# Altium PCB ledbrick_plus_led.PcbDoc
Units mil, origin at the board's own origin, x right, y up, seen from the top; angles counter-clockwise.
Board outline 6299.21 x 3425.2 mil, 2 copper layers (Top Layer, Bottom Side), stack 62.424 mil thick; 91 components, 89 nets, 287 pads, 0 vias.
Unrouted connection lines stored in the file: 3.
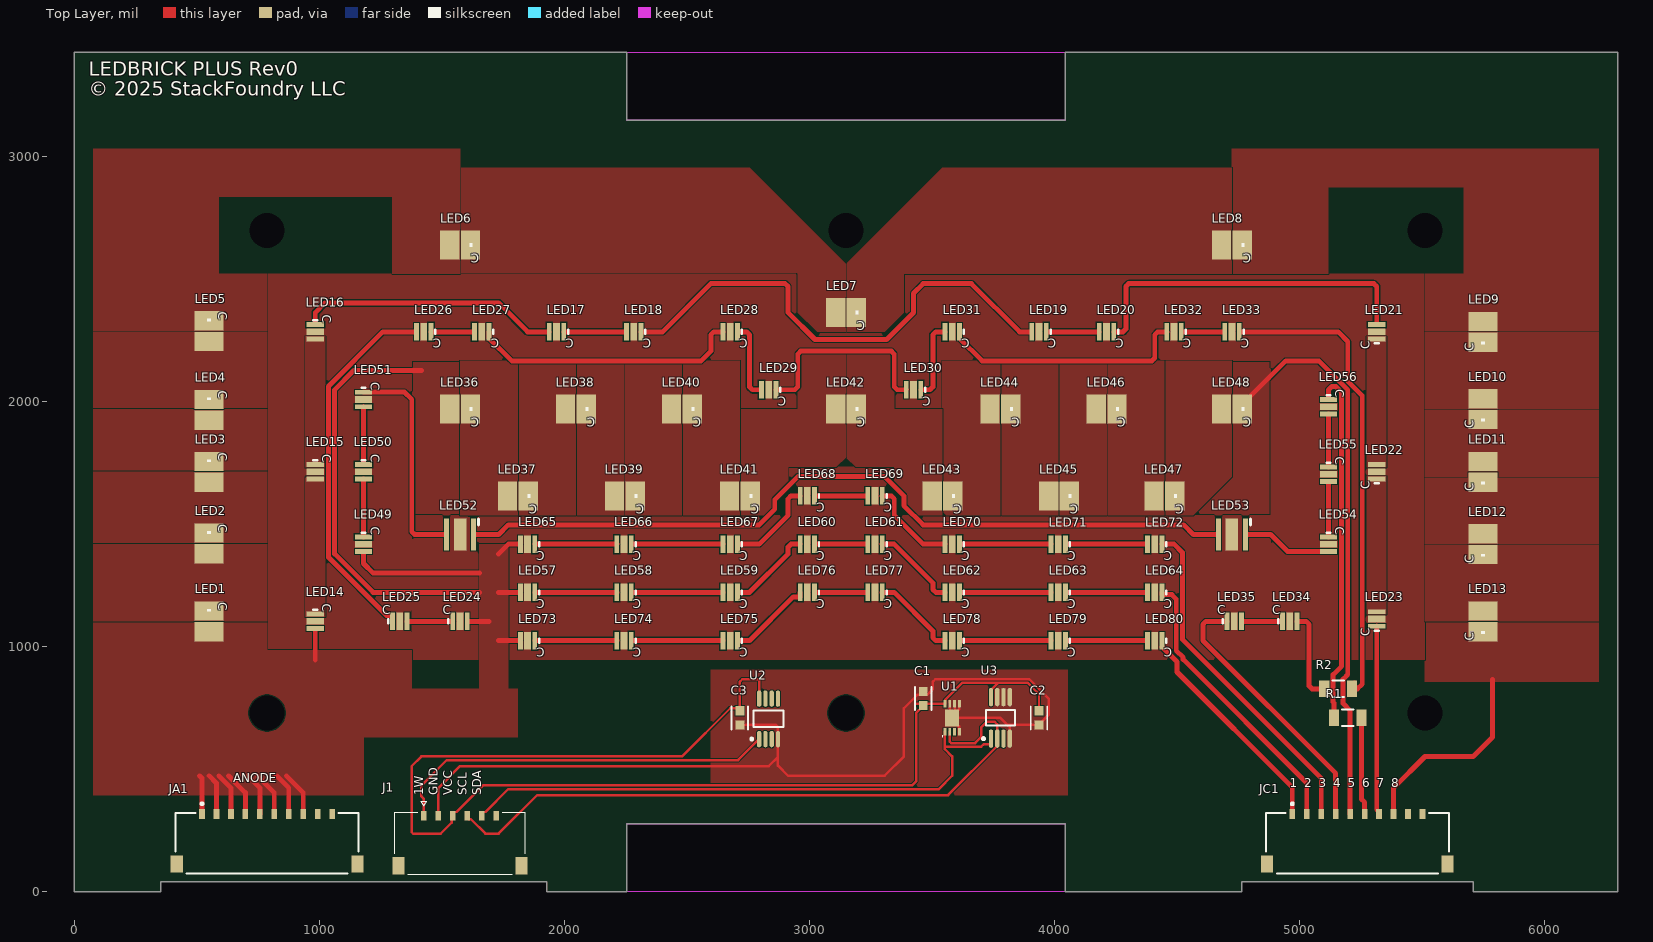
[diagram p0: Top Layer view]
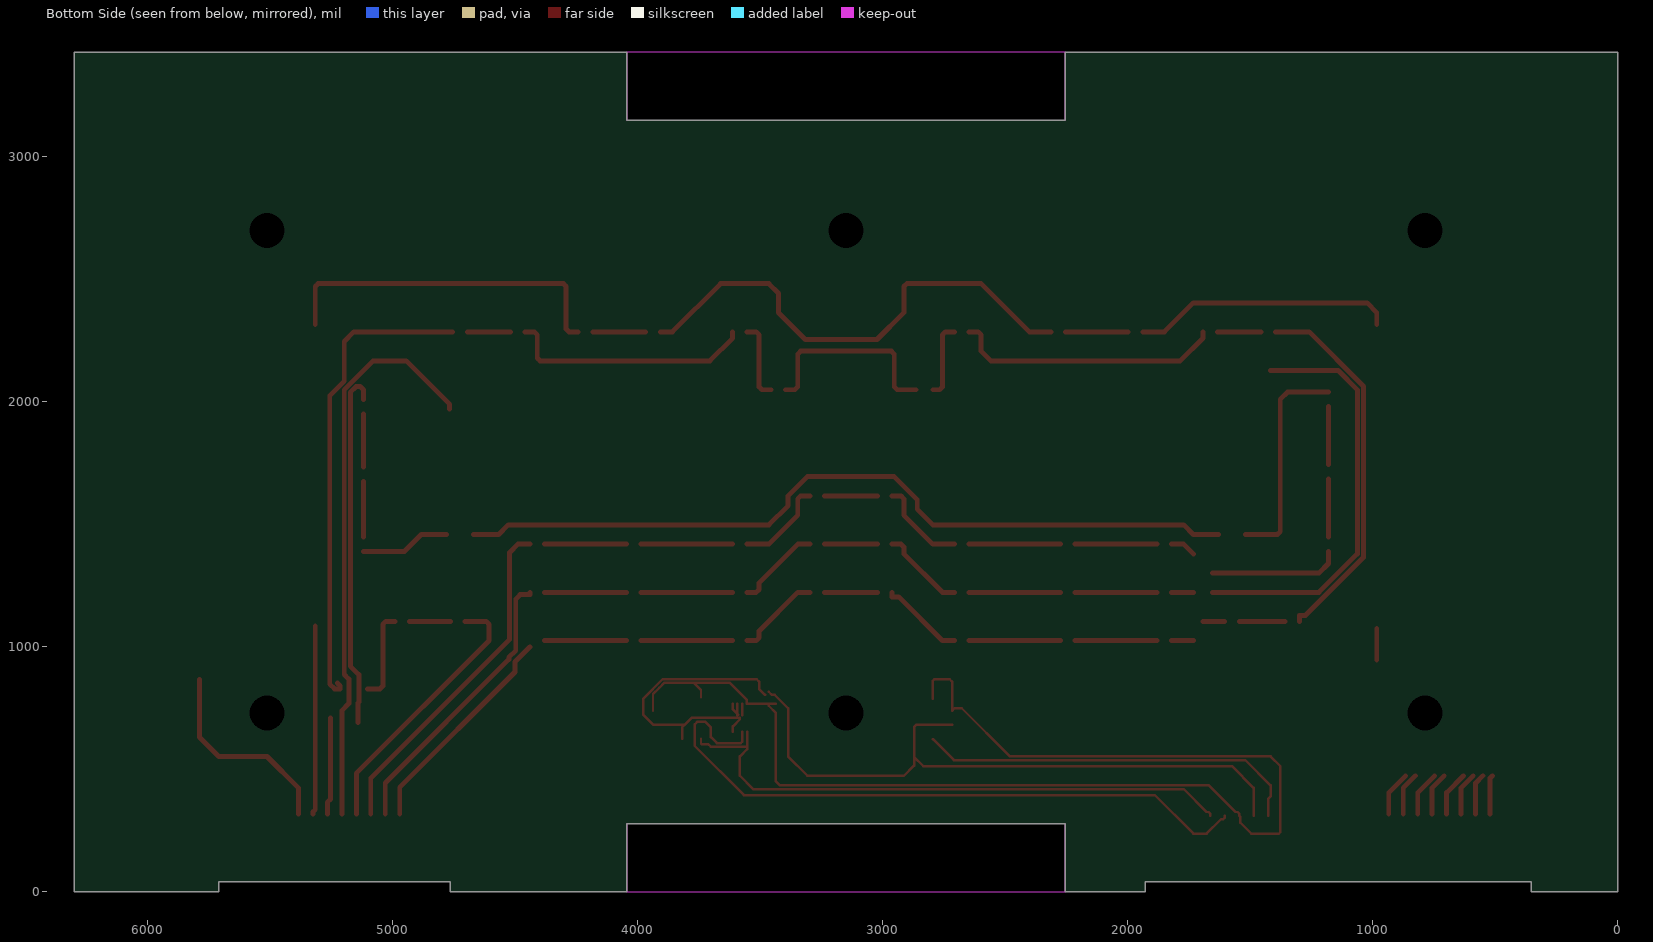
[diagram p1: Bottom Side view, seen from below]
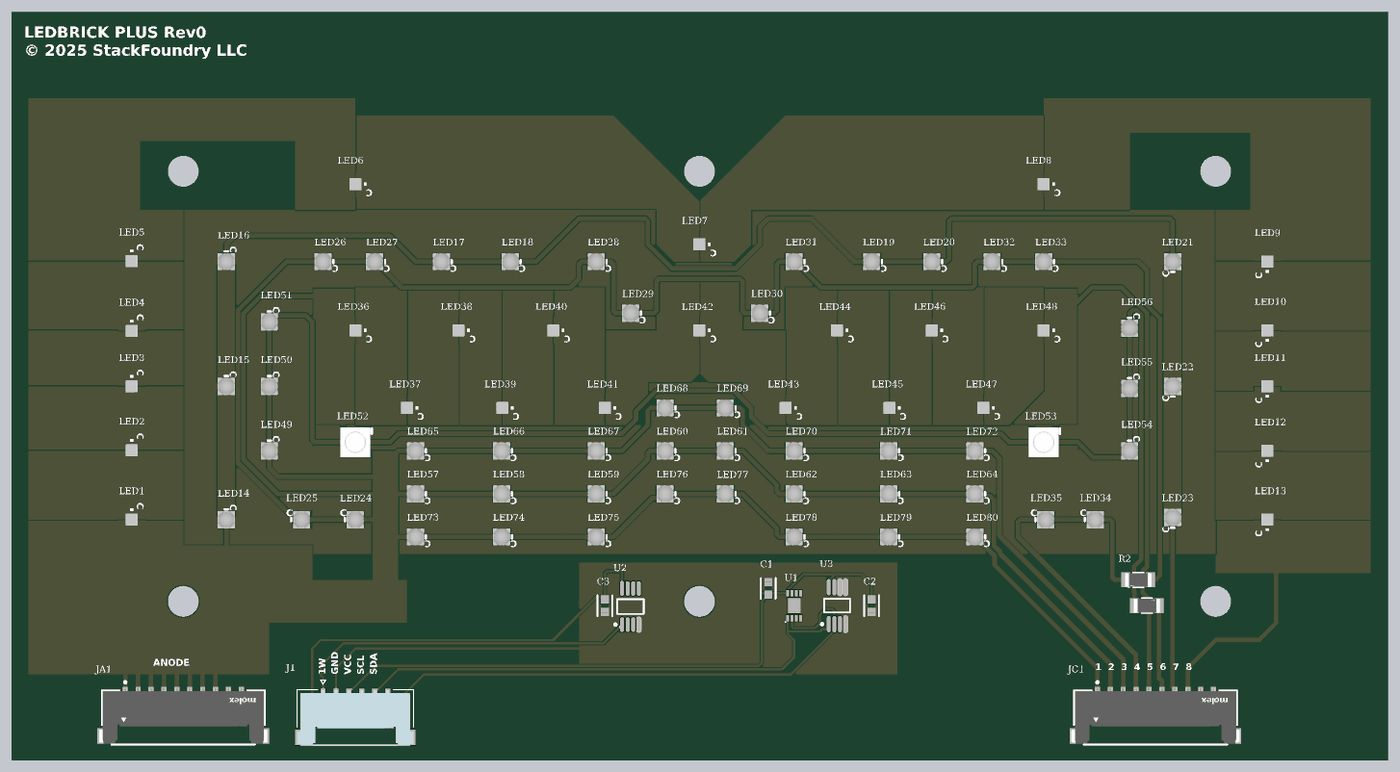
[diagram p2: 3D render of the assembled board from above, using the file's embedded part models]

## Layer stack, top to bottom
Top Solder: solder mask 0.4, Solder Resist, Dk 3.5
Top Layer: signal copper 1.4
Dielectric 1: dielectric 61.0236, FR-4, Dk 4.8
Bottom Side: signal copper (thickness not stored)

## Board outline
354.33,0 354.33,39.37 1929.13,39.37 1929.13,0 2255.91,0 2255.91,277.56 4043.31,277.56 4043.31,0 4763.78,0 4763.78,39.37 5708.66,39.37 5708.66,0 6299.21,0 6299.21,3425.2 4043.31,3425.2 4043.31,3147.64 2255.91,3147.64 2255.91,3425.2 0,3425.2 0,0
cut-out: 4043.31,277.56 4043.31,0 2255.91,0 2255.91,277.56
cut-out: 4043.31,3425.2 4043.31,3147.64 2255.91,3147.64 2255.91,3425.2

## Design rules (kind name [scope] priority, off if disabled: settings)
Clearance [All] p1: gap=5 ignorepadtopadclearanceinfootprint=FALSE
DiffPairsRouting [All] p1: maxlimit=10 minlimit=10 mostfreqgap=10 toplayer_minwidth=15 toplayer_maxwidth=15 toplayer_prefwidth=15 bottomlayer_minwidth=15 bottomlayer_maxwidth=15 bottomlayer_prefwidth=15 substack1={F33BE5C2-3215-45A0-9E63-FB9E8E5C9FC0} toplayer_{f33be5c2-3215-45a0-9e63-fb9e8e5c9fc0}_minwidth=15 toplayer_{f33be5c2-3215-45a0-9e63-fb9e8e5c9fc0}_maxwidth=15 toplayer_{f33be5c2-3215-45a0-9e63-fb9e8e5c9fc0}_prefwidth=15 bottomlayer_{f33be5c2-3215-45a0-9e63-fb9e8e5c9fc0}_minwidth=15 bottomlayer_{f33be5c2-3215-45a0-9e63-fb9e8e5c9fc0}_maxwidth=15 bottomlayer_{f33be5c2-3215-45a0-9e63-fb9e8e5c9fc0}_prefwidth=15 maxuncoupledlength=500
PolygonConnect [All] p1: thpad.connectstyle=Relief thpad.reliefconductorwidth=10 thpad.reliefentries=4 thpad.polygonreliefangle="90 Angle" thpad.airgapwidth=10 smdpad.connectstyle=Direct smdpad.reliefconductorwidth=10 smdpad.reliefentries=4 smdpad.polygonreliefangle="90 Angle" smdpad.airgapwidth=10 via.connectstyle=Direct via.reliefconductorwidth=10 via.reliefentries=4 via.polygonreliefangle="90 Angle" via.airgapwidth=10
RoutingVias [All] p1: holewidth=28 width=50 viastyle="Through Hole" minholewidth=28 minwidth=50 maxholewidth=28 maxwidth=50
SolderMaskExpansion [All] p1: expansion=4 istentingtop=FALSE
SupplyNets "Schematic Supply Nets_1" [InNet('GND')] p1: voltage=0.000
SupplyNets "Schematic Supply Nets" [InNet('VCC')] p2: voltage=0.000
Width [All] p1: maxlimit=10 minlimit=10 preferedwidth=10 substack1={F33BE5C2-3215-45A0-9E63-FB9E8E5C9FC0} toplayer_{f33be5c2-3215-45a0-9e63-fb9e8e5c9fc0}_maxwidth=50 bottomlayer_{f33be5c2-3215-45a0-9e63-fb9e8e5c9fc0}_maxwidth=50
29 further rules are at their usual default settings.

## Components (designator, comment, footprint, x,y, rotation, side; value= is the part's Value field where it differs from the comment)
C1 "CAP 0.1uF 50V X7R 0603" FP-CL10-IPC_B 3464.57,787.4 r90 top value=0.1uF
C2 "CAP 0.1uF 50V X7R 0603" FP-CL10-IPC_B 3937.01,708.66 r270 top value=0.1uF
C3 "CAP 0.1uF 50V X7R 0603" FP-CL10-IPC_B 2716.54,708.66 r270 top value=0.1uF
J1 "5040500691" MOLEX_5040500691 1574.8,196.85 r180 top
JA1 "504050-1091" FP-504050-1091-MFG 787.4,196.85 r180 top
JC1 "504050-1091" FP-504050-1091-MFG 5236.22,196.85 r180 top
LED1 "L1RX-RYL1000000000" L1RX-RYL1000000000-Footprint-1 551.18,1102.36 r270 top
LED2 "L1RX-RYL1000000000" L1RX-RYL1000000000-Footprint-1 551.18,1420.28 r270 top
LED3 "L1RX-RYL1000000000" L1RX-RYL1000000000-Footprint-1 551.18,1712.6 r270 top
LED4 "L1RX-RYL1000000000" L1RX-RYL1000000000-Footprint-1 551.18,1965.55 r270 top
LED5 "L1RX-RYL1000000000" L1RX-RYL1000000000-Footprint-1 551.18,2286.42 r270 top
LED6 "L1RX-RYL1000000000" L1RX-RYL1000000000-Footprint-1 1574.8,2637.8 r180 top
LED7 "L1RX-RYL1000000000" L1RX-RYL1000000000-Footprint-1 3149.61,2362.2 r180 top
LED8 "L1RX-RYL1000000000" L1RX-RYL1000000000-Footprint-1 4724.41,2637.8 r180 top
LED9 "L1RX-RYL1000000000" L1RX-RYL1000000000-Footprint-1 5748.03,2283.46 r90 top
LED10 "L1RX-RYL1000000000" L1RX-RYL1000000000-Footprint-1 5748.03,1968.5 r90 top
LED11 "L1RX-RYL1000000000" L1RX-RYL1000000000-Footprint-1 5748.03,1712.6 r90 top
LED12 "L1RX-RYL1000000000" L1RX-RYL1000000000-Footprint-1 5748.03,1417.32 r90 top
LED13 "L1RX-RYL1000000000" L1RX-RYL1000000000-Footprint-1 5748.03,1102.36 r90 top
LED14 "L1C1-59" LUXEON_C_DATASHEET 984.25,1102.36 r270 top
LED15 "L1C1-59" LUXEON_C_DATASHEET 984.25,1712.6 r270 top
LED16 "L1C1-59" LUXEON_C_DATASHEET 984.25,2283.46 r270 top
LED17 "L1C1-RYL" LUXEON_C_DATASHEET 1968.5,2283.46 r180 top
LED18 "L1C1-RYL" LUXEON_C_DATASHEET 2283.46,2283.46 r180 top
LED19 "L1C1-RYL" LUXEON_C_DATASHEET 3937.01,2283.46 r180 top
LED20 "L1C1-RYL" LUXEON_C_DATASHEET 4212.6,2283.46 r180 top
LED21 "L1C1-59" LUXEON_C_DATASHEET 5314.96,2283.46 r90 top
LED22 "L1C1-59" LUXEON_C_DATASHEET 5314.96,1712.6 r90 top
LED23 "L1C1-59" LUXEON_C_DATASHEET 5314.96,1112.2 r90 top
LED24 "L1C1-PCB" LUXEON_C_DATASHEET 1574.8,1102.36 r0 top
LED25 "L1C1-PCB" LUXEON_C_DATASHEET 1328.74,1102.36 r0 top
LED26 "L1C1-PCB" LUXEON_C_DATASHEET 1427.17,2283.46 r180 top
LED27 "L1C1-PCB" LUXEON_C_DATASHEET 1663.39,2283.46 r180 top
LED28 "L1C1-BLU" LUXEON_C_DATASHEET 2677.17,2283.46 r180 top
LED29 "L1C1-BLU" LUXEON_C_DATASHEET 2834.65,2047.24 r180 top
LED30 "L1C1-PCB" LUXEON_C_DATASHEET 3425.2,2047.24 r180 top
LED31 "L1C1-PCB" LUXEON_C_DATASHEET 3582.68,2283.46 r180 top
LED32 "L1C1-PCB" LUXEON_C_DATASHEET 4488.19,2283.46 r180 top
LED33 "L1C1-PCB" LUXEON_C_DATASHEET 4724.41,2283.46 r180 top
LED34 "L1C1-BLU" LUXEON_C_DATASHEET 4960.63,1102.36 r0 top
LED35 "L1C1-BLU" LUXEON_C_DATASHEET 4734.25,1102.36 r0 top
LED36 "L1RX-RYL1000000000" L1RX-RYL1000000000-Footprint-1 1574.8,1968.5 r180 top
LED37 "L1RX-RYL1000000000" L1RX-RYL1000000000-Footprint-1 1811.02,1614.17 r180 top
LED38 "L1RX-RYL1000000000" L1RX-RYL1000000000-Footprint-1 2047.24,1968.5 r180 top
LED39 "L1RX-RYL1000000000" L1RX-RYL1000000000-Footprint-1 2247.05,1614.17 r180 top
LED40 "L1RX-RYL1000000000" L1RX-RYL1000000000-Footprint-1 2480.32,1968.5 r180 top
LED41 "L1RX-RYL1000000000" L1RX-RYL1000000000-Footprint-1 2716.54,1614.17 r180 top
LED42 "L1RX-RYL1000000000" L1RX-RYL1000000000-Footprint-1 3149.61,1968.5 r180 top
LED43 "L1RX-RYL1000000000" L1RX-RYL1000000000-Footprint-1 3543.31,1614.17 r180 top
LED44 "L1RX-RYL1000000000" L1RX-RYL1000000000-Footprint-1 3779.53,1968.5 r180 top
LED45 "L1RX-RYL1000000000" L1RX-RYL1000000000-Footprint-1 4018.7,1614.17 r180 top
LED46 "L1RX-RYL1000000000" L1RX-RYL1000000000-Footprint-1 4212.6,1968.5 r180 top
LED47 "L1RX-RYL1000000000" L1RX-RYL1000000000-Footprint-1 4448.82,1614.17 r180 top
LED48 "L1RX-RYL1000000000" L1RX-RYL1000000000-Footprint-1 4724.41,1968.5 r180 top
LED49 "L1C1-VLT" LUXEON_C_DATASHEET 1181.1,1417.32 r270 top
LED50 "L1C1-VLT" LUXEON_C_DATASHEET 1181.1,1712.6 r270 top
LED51 "L1C1-VLT" LUXEON_C_DATASHEET 1181.1,2007.87 r270 top
LED52 "CUN8" VIOSYS_Z5 1574.8,1456.69 r0 top
LED53 "CUN8" VIOSYS_Z5 4724.41,1456.69 r0 top
LED54 "L1C1-VLT" LUXEON_C_DATASHEET 5118.11,1417.32 r270 top
LED55 "L1C1-VLT" LUXEON_C_DATASHEET 5118.11,1702.76 r270 top
LED56 "L1C1-VLT" LUXEON_C_DATASHEET 5118.11,1978.35 r270 top
LED57 "L1C1-59" LUXEON_C_DATASHEET 1850.39,1220.47 r180 top
LED58 "L1C1-59" LUXEON_C_DATASHEET 2244.09,1220.47 r180 top
LED59 "L1C1-59" LUXEON_C_DATASHEET 2677.17,1220.47 r180 top
LED60 "L1C1-59" LUXEON_C_DATASHEET 2992.13,1417.32 r180 top
LED61 "L1C1-59" LUXEON_C_DATASHEET 3267.72,1417.32 r180 top
LED62 "L1C1-59" LUXEON_C_DATASHEET 3582.68,1220.47 r180 top
LED63 "L1C1-59" LUXEON_C_DATASHEET 4015.75,1220.47 r180 top
LED64 "L1C1-59" LUXEON_C_DATASHEET 4409.45,1220.47 r180 top
LED65 "L1C1-39" LUXEON_C_DATASHEET 1850.39,1417.32 r180 top
LED66 "L1C1-39" LUXEON_C_DATASHEET 2244.09,1417.32 r180 top
LED67 "L1C1-DRD" LUXEON_C_DATASHEET 2677.17,1417.32 r180 top
LED68 "L1C1-PCA" LUXEON_C_DATASHEET 2992.13,1614.17 r180 top
LED69 "L1C1-PCA" LUXEON_C_DATASHEET 3267.72,1614.17 r180 top
LED70 "L1C1-DRD" LUXEON_C_DATASHEET 3582.68,1417.32 r180 top
LED71 "L1C1-39" LUXEON_C_DATASHEET 4015.75,1417.32 r180 top
LED72 "L1C1-39" LUXEON_C_DATASHEET 4409.45,1417.32 r180 top
LED73 "L1C1-MNT" LUXEON_C_DATASHEET 1850.39,1023.62 r180 top
LED74 "L1C1-CYN" LUXEON_C_DATASHEET 2244.09,1023.62 r180 top
LED75 "L1C1-MNT" LUXEON_C_DATASHEET 2677.17,1023.62 r180 top
LED76 "L1C1-CYN" LUXEON_C_DATASHEET 2992.13,1220.47 r180 top
LED77 "L1C1-MNT" LUXEON_C_DATASHEET 3267.72,1220.47 r180 top
LED78 "L1C1-CYN" LUXEON_C_DATASHEET 3582.68,1023.62 r180 top
LED79 "L1C1-MNT" LUXEON_C_DATASHEET 4015.75,1023.62 r180 top
LED80 "L1C1-CYN" LUXEON_C_DATASHEET 4409.45,1023.62 r180 top
R1 "0R 1206" FP-RC1206-IPC_B 5196.85,708.66 r0 top
R2 "0R 1206" FP-RC1206-IPC_B 5157.48,826.77 r180 top
U1 "MCP9808T-E/MC" MCHP-DFN-MC8_V 3582.68,708.66 r90 top
U2 "DS18B20U+T&R" MAXM-U8+1_N 2833.66,704.72 r90 top
U3 "MCP9808" MCHP-MSOP-MS8_M 3779.53,708.66 r90 top

## Footprints (in the part's own frame and the unit in brackets; to place one, negate y for a bottom-side part, rotate by r counter-clockwise, add the part's x,y. Pads: shape width x height; smd on the part's side, far side on the other; paste and mask are expansions set on the pad)
FP-504050-1091-MFG [mm]
  rect 0.6x1 smd paste+0 mask+0: 1(6.75,-3.04) 2(5.25,-3.04) 3(3.75,-3.04) 4(2.25,-3.04) 5(0.75,-3.04) 6(-0.75,-3.04) 7(-2.25,-3.04) 8(-3.75,-3.04) 9(-5.25,-3.04) 10(-6.75,-3.04)
  rect 1.25x1.8 smd paste+0 mask+0: 11(-9.355,2.15) 12(9.355,2.15)
  silkscreen extent -9.48,-4.21 9.48,3.15, body extent -10.08,-3.64 10.08,3.25, height 0.25
FP-CL10-IPC_B [mil]
  rect 37.72x35.91 smd paste+0 mask+0: 1(-28.62,0) 2(28.62,0)
  silkscreen extent -47,-34 47,34, body extent -57,-28 57,28, height 10
FP-RC1206-IPC_B [mil]
  rect 41.66x67.41 smd paste+0 mask+0: 1(-56.18,0) 2(56.18,0)
  silkscreen extent -24,-34 24,34, body extent -87,-44 87,44, height 10
L1RX-RYL1000000000-Footprint-1 [mm]
  rect 2x3 smd paste-2539.97 mask-2: A(1.075,0) C(-1.075,0)
  silkscreen extent -1.3,-0.2 -1,0.2, body extent -0.7,-0.7 0.7,0.7, height 0.8
LUXEON_C_DATASHEET [mm]
  rect 0.5x1.8 smd paste-2539.97 mask-3: A(0.75,0)
  rect 0.5x1.8 smd paste-2539.97 mask-2: C(-0.75,0)
  rect 0.69x1.8 smd paste-2539.97 mask-3: PAD(0,0)
  silkscreen extent -1.2,-0.2 -1.2,0.2, body extent -1,-1 1,1, height 1.36
MAXM-U8+1_N [mm] "SOP, 8-Leads, Body 3x3mm, Pitch 0.65mm, IPC Medium Density"
  oval 1.7x0.45 smd: 1(-2.1,0.975) 2(-2.1,0.325) 3(-2.1,-0.325) 4(-2.1,-0.975) 5(2.1,-0.975) 6(2.1,-0.325) 7(2.1,0.325) 8(2.1,0.975)
  silkscreen extent -2.22,-1.55 0.85,1.87, body extent -1.55,-1.55 1.55,1.55, height 1.1
MCHP-DFN-MC8_V [mm] "SON, 8-Leads, Body 3x2mm, Pitch 0.5mm, Thermal Pad 1.45x1.75mm"
  rect 0.75x0.3 smd mask+0.102: 1(-1.45,0.75) 2(-1.45,0.25) 3(-1.45,-0.25) 4(-1.45,-0.75) 5(1.45,-0.75) 6(1.45,-0.25) 7(1.45,0.25) 8(1.45,0.75)
  rect 1.75x1.45 smd mask+0.102: 9(0,0)
  silkscreen extent -1.95,0.95 -1.85,1.05, body extent -1.5,-1 1.5,1, height 1
MCHP-MSOP-MS8_M [mm] "SOP, 8-Leads, Body 3x3mm, Pitch 0.65mm, IPC Low Density"
  oval 1.9x0.45 smd: 1(-2.15,0.975) 2(-2.15,0.325) 3(-2.15,-0.325) 4(-2.15,-0.975) 5(2.15,-0.975) 6(2.15,-0.325) 7(2.15,0.325) 8(2.15,0.975)
  silkscreen extent -2.27,-1.5 0.8,1.87, body extent -1.5,-1.5 1.5,1.5, height 1.1
MOLEX_5040500691 [mm]
  rect 0.6x1 smd mask+0.076: 1(3.75,-2.87) 2(2.25,-2.87) 3(0.75,-2.87) 4(-0.75,-2.87) 5(-2.25,-2.87) 6(-3.75,-2.87)
  rect 1.25x1.8 smd mask+0.076: S1(6.355,2.32) S2(-6.355,2.32)
  silkscreen extent -6.78,-4.37 6.78,3.22, body extent -6.78,-3.18 6.78,3.26, height 2
VIOSYS_Z5 [mm]
  rect 0.5x3.3 smd: A(-1.4,0) C(1.4,0)
  rect 1.3x3.3 smd: PAD(0,0)
  Top Layer region: 1.6,-0.25 2.15,-0.25 2.15,0.25 1.6,0.25
  Top Layer region: -2.15,-0.25 -1.6,-0.25 -1.6,0.25 -2.15,0.25
  silkscreen extent 1.9,1 1.9,1.6, body extent -1.73,-1.72 1.72,1.73, height 2.01

## Part data
C1 C2 C3: library part CMP-001-00084-7, "Cap Ceramic 0.1uF 50V X7R 20% SMD 0603 125C Paper T/R", Voltage=50V
J1: library part CMP-253-000000-2, "CONN WIRE TO BOARD RA 6POS", Color=Black, Current Rating=3A, Flammability Rating="UL94 V-0", Max Operating Temperature=85°C, Min Operating Temperature=-25°C, Package=None, Package Quantity=2700, Voltage Rating=150V, Availability=Unavailable, Component Type=Standard, Connector Type="Blade Pin", Contact Gender=Male, Contact Material="Copper Alloy,Copper", Contact Plating=Gold, Depth=6.44mm, Design Item ID=5040500691, Gender=Male, Glow Wire Compliant=Non-compliant, Halogen Free="Low Halogen", Housing Color=Black, Housing Material=Thermoplastic, Length=13.55mm, Mounting Technology="Surface Mount", MP=5040500691, Number of Circuits=6, Number of Contacts=6, Number of Positions=6, Number of Rows=1, Orientation="Right Angle", Packaging="Tape and Reel", Pin Count=8, Pitch=1.5mm, Price=None, Radiation Hardening=No, RoHS Compliant=Yes, Source=5040500691.SchLib, Termination=SMD/SMT
JA1 JC1: library part CMP-002-00088-1, "Conn Wire to Board HDR 10 POS 1.5mm Solder RA SMD Pico-Lock™ T/R"
LED1 LED2 LED3 LED4 LED5 LED6 LED7 LED8 LED9 LED10 LED11 LED12 LED13 LED36 LED37 LED38 LED39 LED40 LED41 LED42 LED43 LED44 LED45 LED46 LED47 LED48: library part CMP-007-00052-3, "LUXEON Rubix High Power LED Royal Blue Square Surface Mount 1635 lm 1.5 A 3.16 V", Forward Current=3A, Forward Voltage=3.5V, Height=780µm, Lifecycle Status=Production, Mounting Technology="Surface Mount", Number of Circuits=1, Number of Terminals=2, Peak Wavelength=447.5nm, REACH SVHC=Yes, RoHS=Compliant, Shape=Square, Terminal Pitch=725µm, Viewing Angle=125°
LED14 LED15 LED16 LED17 LED18 LED19 LED20 LED21 LED22 LED23 LED24 LED25 LED26 LED27 LED28 LED29 LED30 LED31 LED32 LED33 LED34 LED35 LED49 LED50 LED51 LED52 LED53 LED54 LED55 LED56 LED57 LED58 LED59 LED60 LED61 LED62 LED63 LED64 LED65 LED66 LED67 LED68 LED69 LED70 LED71 LED72 LED73 LED74 LED75 LED76 LED77 LED78 LED79 LED80: library part CMP-124-0001-3, Design Item ID=LED_THERMAL, Source=high-power-led.SCHLIB
R1 R2: library part CMP-009-00181-1, "Res Jumper Thick Film 1206 0 Ohm 5% 1/4W Molded SMD Paper T/R", Case Code (Imperial)=1206, Case Code (Metric)=3216, Max Operating Temperature=155°C, Max Power Dissipation=250mW, Min Operating Temperature=-55°C, Package Quantity=5000, Resistance=0mR, Resistor Type="Thick Film,Carbon Film", Temperature Coefficient=200ppm/°C, Tolerance=5%, Voltage Rating=200V, Case/Package=1206, Contact Plating=Tin,Matte, Depth=1.6mm, Height=0.026inch, Lead Free="Lead Free", Length=3.1mm, Military Standard=Not, Number of Terminations=2, Packaging="Tape and Reel", Power Rating=250mW, Radiation Hardening=No, REACH SVHC=Unknown, Termination=SMD/SMT, Width=0.063inch
U1: library part CMP-010-00024-2, "Temp Sensor Digital Serial (2-Wire, I2C) 8-Pin DFN EP T/R", Case/Package=DFN, Max Operating Temperature=125°C, Max Supply Voltage=5.5V, Min Operating Temperature=-40°C, Min Supply Voltage=2.7V, Nominal Supply Current=200uA, Package Quantity=3300, Contact Plating=Tin,Matte, Interface=I2C,SMBus,2-Wire,Serial, Lead Free="Lead Free", Max Supply Voltage (DC)=5.5V, Min Supply Voltage (DC)=2.7V, Number of Bits=16, Number of Pins=8, Operating Supply Current=200uA, Output Current=200uA, Output Type=I2C,Digital, Packaging="Tape and Reel", Radiation Hardening=No, REACH SVHC="No SVHC", Resolution=10b
U2: library part CMP-010-00025-1, "Temp Sensor Digital Serial (1-Wire) 8-Pin uMAX T/R", Case/Package=UMAX, Contact Plating=Tin,Matte, Interface=1-WIRE,Serial, Lead Free="Lead Free"
U3: library part CMP-114-0012-2, "Temp Sensor Digital Serial (2-Wire, I2C) 8-Pin MSOP Tube", Case/Package=MSOP, Max Operating Temperature=125°C, Max Supply Voltage=5.5V, Min Operating Temperature=-40°C, Min Supply Voltage=2.7V, Nominal Supply Current=200uA, Package Quantity=100, Height=0.95mm, Interface=I2C,SMBus,2-Wire,Serial, Lead Free="Lead Free", Length=3mm, Max Supply Voltage (DC)=5.5V, Min Supply Voltage (DC)=2.7V, Number of Bits=16, Number of Pins=8, Output Current=200uA, Output Type=I2C,Digital, Packaging=Rail/Tube, Radiation Hardening=No, REACH SVHC="No SVHC", Resolution=10b, Width=3mm

## Free pads (board coordinates)
  round 60 hole 141.73 unplated: Hole1(3149.61,2696.85) Hole1_2(3149.61,728.35) Hole4(787.4,2696.85) Hole4_2(787.4,728.35) Hole4_3(5511.81,728.35) Hole4_4(5511.81,2696.85)

## Nets (pads, with @x,y where several pads share a name; then routed paths per layer and width w, separated by ;. In a path a pad name is that pad's centre, name@x,y a point inside that pad or via, vN(x,y) a via of type N, cw(c..) or ccw(c..) an arc to the next point about the centre after c; other vN are vias at no path point)
1W: J1.1 U2.1 | length 1583.5
  Top Layer w10: J1.1 1427.17,378.02 1417.32,387.86 1417.32,433.07 1520.43,536.18 2709.41,536.18 U2.1
GND: C1.2 C2.2 C3.2 J1.2 U1.4 U1.5 U1.6 U1.7 U1.9 U2.4 U3.4 U3.5 U3.6 U3.7 | length 4076.2
  Top Layer w10: J1.2 1486.22,423.23 1574.8,511.81 2834.65,511.81 2872.05,549.21 ; C3.2 2863.27,680.04 2872.05,671.26 U2.4 2872.05,549.21 ; C1.2 3464.57,815.34 3451.61,802.38 3440.18,802.38 3385.83,748.03 3385.83,551.18 3307.09,472.44 2913.39,472.44 2872.05,513.78 2872.05,549.21 ; C1.2@3479.55,802.38 3503.94,826.77 3503.94,856.3 3513.78,866.14 3897.64,866.14 3976.38,787.4 3976.38,720.32 3937.01,680.95 C2.2 3808.15,680.04 ; U1.9@3572.83,718.5 U1.7 ; U1.9@3589.57,721.46 U1.9@3592.52,724.41 ; U1.9@3592.52,718.5 U1.9@3592.52,724.41 ; U1.6 U1.9@3592.52,724.41 ; U1.4 3611.3,652.48 3611.3,674.13 3582.68,702.76 U1.9 3779.53,708.66 3808.15,680.04 ; U1.5 3611.3,764.84 3611.3,743.19 U1.9@3592.52,724.41 ; U3.4 3817.91,670.28 3808.15,680.04
NetJA1_1: JA1.1 JA1.2 JA1.3 JA1.4 JA1.5 JA1.6 JA1.7 JA1.8 LED1.A LED14.A LED24.A LED36.A LED49.A LED57.A LED65.A LED73.A | length 4158.9
  Top Layer w20: 511.81,472.44 521.65,462.6 JA1.1 ; 551.18,472.44 580.71,442.91 JA1.2 ; 590.55,472.44 639.76,423.23 JA1.3 ; 629.92,472.44 698.82,403.54 JA1.4 ; 708.66,472.44 757.87,423.23 JA1.5 ; 748.03,472.44 816.93,403.54 JA1.6 ; 826.77,472.44 875.98,423.23 JA1.7 ; 866.14,472.44 935.04,403.54 JA1.8 ; 984.25,944.88 LED14.A ; LED49.A 1181.1,1338.58 1220.47,1299.21 1653.54,1299.21 ; 1417.32,2125.98 1141.73,2125.98 1062.99,2047.24 1062.99,1377.95 1220.47,1220.47 1653.54,1220.47 ; LED24.A 1692.91,1102.36 ; 1732.28,1023.62 LED73.A ; 1732.28,1220.47 LED57.A ; 1732.28,1377.95 1771.65,1417.32 LED65.A
NetJC1_1: JC1.1 LED80.C | length 901.7
  Top Layer w20: LED80.C@4439.13,998.19 4500.21,937.11 4500.21,895.73 4970.47,425.47 JC1.1
NetJC1_2: JC1.2 LED64.C | length 1172
  Top Layer w20: LED64.C 4438.98,1211.59 4439.13,1211.43 4479.15,1211.43 4497.24,1193.34 4497.24,983.23 4525.21,955.26 4525.21,947.23 5029.53,442.91 JC1.2
NetJC1_3: JC1.3 LED72.C | length 1398.7
  Top Layer w20: LED72.C 4488.19,1417.32 4522.24,1383.27 4522.24,1028.94 5088.58,462.6 JC1.3
NetJC1_4: JC1.4 LED35.C | length 1101.6
  Top Layer w20: LED35.C 4618.01,1102.36 4606.3,1090.65 4606.3,1023.62 5147.64,482.28 JC1.4
NetJC1_5: JC1.5 LED48.C | length 2322.7
  Top Layer w20: LED48.C 4766.73,1988.19 4943.9,2165.35 5078.74,2165.35 5196.85,2047.24 5196.85,885.71 5177.83,866.69 5177.83,767.05 5206.69,738.19 JC1.5
NetJC1_6: JC1.6 R1.2 | length 397.4
  Top Layer w20: R1.2 5253.03,376.89 5265.75,364.17 JC1.6
NetJC1_7: JC1.7 LED23.C | length 770.2
  Top Layer w20: LED23.C 5314.96,334.25 5324.8,324.41 JC1.7
NetJC1_8: JC1.8 LED13.C | length 832.1
  Top Layer w20: JC1.8 5383.86,423.23 5511.81,551.18 5708.66,551.18 5787.4,629.92 5787.4,866.14
NetLED1_C: LED1.C LED2.A
NetLED2_C: LED2.C LED3.A
NetLED3_C: LED3.C LED4.A
NetLED4_C: LED4.C LED5.A
NetLED5_C: LED5.C LED6.A
NetLED6_C: LED6.C LED7.A
NetLED7_C: LED7.C LED8.A
NetLED8_C: LED8.C LED9.A
NetLED9_C: LED9.C LED10.A
NetLED10_C: LED10.C LED11.A
NetLED11_C: LED11.C LED12.A
NetLED12_C: LED12.C LED13.A
NetLED14_C: LED14.C LED15.A
NetLED15_C: LED15.C LED16.A
NetLED16_C: LED16.C LED17.A | length 1069.2
  Top Layer w20: LED16.C 984.25,2362.2 1023.62,2401.57 1732.28,2401.57 1850.39,2283.46 LED17.A
NetLED17_C: LED17.C LED18.A | length 255.9
  Top Layer w20: LED17.C LED18.A
NetLED18_C: LED18.C LED19.A | length 2054.8
  Top Layer w20: LED18.C 2401.57,2283.46 2598.43,2480.32 2901.67,2480.32 2913.39,2468.6 2913.39,2362.2 3023.21,2252.38 3315.37,2252.38 3425.2,2362.2 3425.2,2440.95 3464.57,2480.32 3661.42,2480.32 3858.27,2283.46 LED19.A
NetLED19_C: LED19.C LED20.A | length 216.5
  Top Layer w20: LED19.C LED20.A
NetLED20_C: LED20.C LED21.A | length 1416.4
  Top Layer w20: LED20.C 4279.62,2283.46 4291.34,2295.18 4291.34,2468.6 4303.05,2480.32 5303.24,2480.32 5314.96,2468.6 LED21.A
NetLED21_C: LED21.C LED22.A
NetLED22_C: LED22.C LED23.A
NetLED24_C: LED24.C LED25.A | length 187
  Top Layer w20: LED25.A LED24.C
NetLED25_C: LED25.C LED26.A | length 1532.9
  Top Layer w20: LED25.C 1299.21,1126.17 1299.06,1126.32 1275.25,1126.32 1037.99,1363.58 1037.99,2061.61 1259.84,2283.46 LED26.A
NetLED26_C: LED26.C LED27.A | length 177.2
  Top Layer w20: LED26.C LED27.A
NetLED27_C: LED27.C LED28.A | length 1106.6
  Top Layer w20: LED27.C 1692.91,2258.19 1785.75,2165.35 2559.06,2165.35 2598.43,2204.72 2598.43,2271.75 2610.14,2283.46 LED28.A
NetLED28_C: LED28.C LED29.A | length 311.1
  Top Layer w20: LED28.C 2744.19,2283.46 2755.91,2271.75 2755.91,2058.96 2767.62,2047.24 2795.28,2047.24
NetLED29_C: LED29.C LED30.A | length 819
  Top Layer w20: LED29.C 2941.04,2047.24 2952.76,2058.96 2952.76,2193.01 2964.47,2204.72 3334.74,2204.72 3346.46,2193.01 3346.46,2058.96 3358.17,2047.24 LED30.A
NetLED30_C: LED30.C LED31.A | length 320.9
  Top Layer w20: LED30.C 3492.22,2047.24 3503.94,2058.96 3503.94,2271.75 3515.65,2283.46 LED31.A
NetLED31_C: LED31.C LED32.A | length 1014.6
  Top Layer w20: LED31.C 3612.2,2258.19 3705.04,2165.35 4397.73,2165.35 4409.45,2177.07 4409.45,2271.75 4421.16,2283.46 LED32.A
NetLED32_C: LED32.C LED33.A | length 177.2
  Top Layer w20: LED32.C LED33.A
NetLED33_C: LED33.C R2.1 | length 1957
  Top Layer w20: LED33.C 5157.48,2283.46 5196.85,2244.09 5196.85,2082.6 5255.91,2023.54 5255.91,846.46 5236.22,826.77 R2.1@5216.54,826.77 ; R2.1 5213.66,839.65 R2.1@5224.49,850.48
NetLED34_A: LED34.A R2.2 | length 373
  Top Layer w20: LED34.A 5027.65,1102.36 5039.37,1090.65 5039.37,838.49 5051.09,826.77 R2.2
NetLED34_C: LED34.C LED35.A | length 167.3
  Top Layer w20: LED35.A LED34.C
NetLED36_C: LED36.C LED37.A
NetLED37_C: LED37.C LED38.A
NetLED38_C: LED38.C LED39.A
NetLED39_C: LED39.C LED40.A
NetLED40_C: LED40.C LED41.A
NetLED41_C: LED41.C LED42.A
NetLED42_C: LED42.C LED43.A
NetLED43_C: LED43.C LED44.A
NetLED44_C: LED44.C LED45.A
NetLED45_C: LED45.C LED46.A
NetLED46_C: LED46.C LED47.A
NetLED47_C: LED47.C LED48.A
NetLED49_C: LED49.C LED50.A | length 236.2
  Top Layer w20: LED49.C LED50.A
NetLED50_C: LED50.C LED51.A | length 236.2
  Top Layer w20: LED50.C LED51.A
NetLED51_C: LED51.C LED52.A | length 895.1
  Top Layer w20: LED51.C 1348.43,2037.4 1377.95,2007.87 1377.95,1468.41 1389.67,1456.69 LED52.A
NetLED52_C: LED52.C LED53.A | length 3281.2
  Top Layer w20: LED52.C 1732.28,1456.69 1771.65,1496.06 2795.28,1496.06 2858.91,1559.7 2858.91,1599.07 2952.76,1692.91 3307.09,1692.91 3385.83,1614.17 3385.83,1574.8 3464.57,1496.06 4527.56,1496.06 4566.93,1456.69 LED53.A
NetLED53_C: LED53.C LED54.A | length 367.1
  Top Layer w20: LED53.C 4881.89,1456.69 4950.79,1387.8 LED54.A
NetLED54_C: LED54.C LED55.A | length 226.4
  Top Layer w20: LED54.C LED55.A
NetLED55_C: LED55.C LED56.A | length 216.5
  Top Layer w20: LED55.C LED56.A
NetLED56_C: LED56.C R1.1 | length 1472.4
  Top Layer w20: LED56.C 5118.11,2047.24 5131.52,2060.65 5148.09,2060.65 5171.85,2036.89 5171.85,919.88 5137.13,885.16 5137.13,772.4 5140.67,768.86 R1.1@5140.67,688.87
NetLED57_C: LED57.C LED58.A | length 334.6
  Top Layer w20: LED57.C LED58.A
NetLED58_C: LED58.C LED59.A | length 374
  Top Layer w20: LED58.C LED59.A
NetLED59_C: LED59.C LED60.A | length 353.6
  Top Layer w20: LED59.C 2755.91,1220.47 2913.39,1377.95 2913.39,1405.61 2925.1,1417.32 LED60.A
NetLED60_C: LED60.C LED61.A | length 216.5
  Top Layer w20: LED60.C LED61.A
NetLED61_C: LED61.C LED62.A | length 353.6
  Top Layer w20: LED61.C 3346.46,1417.32 3503.94,1259.84 3503.94,1232.19 3515.65,1220.47 LED62.A
NetLED62_C: LED62.C LED63.A | length 374
  Top Layer w20: LED62.C LED63.A
NetLED63_C: LED63.C LED64.A | length 334.6
  Top Layer w20: LED63.C LED64.A
NetLED65_C: LED65.C LED66.A | length 334.6
  Top Layer w20: LED65.C LED66.A
NetLED66_C: LED66.C LED67.A | length 374
  Top Layer w20: LED66.C LED67.A
NetLED67_C: LED67.C LED68.A | length 376.7
  Top Layer w20: LED67.C 2795.28,1417.32 2913.39,1535.43 2913.39,1602.46 2925.1,1614.17 LED68.A
NetLED68_C: LED68.C LED69.A | length 216.5
  Top Layer w20: LED68.C LED69.A
NetLED69_C: LED69.C LED70.A | length 376.7
  Top Layer w20: LED69.C 3334.74,1614.17 3346.46,1602.46 3346.46,1535.43 3464.57,1417.32 LED70.A
NetLED70_C: LED70.C LED71.A | length 374
  Top Layer w20: LED70.C LED71.A
NetLED71_C: LED71.C LED72.A | length 334.6
  Top Layer w20: LED71.C LED72.A
NetLED73_C: LED73.C LED74.A | length 334.6
  Top Layer w20: LED73.C LED74.A
NetLED74_C: LED74.C LED75.A | length 374
  Top Layer w20: LED74.C LED75.A
NetLED75_C: LED75.C LED76.A | length 348.2
  Top Layer w20: LED75.C 2755.91,1023.62 2934.31,1202.03 2962.44,1202.03 2962.6,1202.19 LED76.A
NetLED76_C: LED76.C LED77.A | length 216.5
  Top Layer w20: LED76.C LED77.A
NetLED77_C: LED77.C LED78.A | length 353.6
  Top Layer w20: LED77.C 3346.46,1220.47 3503.94,1062.99 3503.94,1035.34 3515.65,1023.62 LED78.A
NetLED78_C: LED78.C LED79.A | length 374
  Top Layer w20: LED78.C LED79.A
NetLED79_C: LED79.C LED80.A | length 334.6
  Top Layer w20: LED79.C LED80.A
SCL: J1.4 U1.2 U3.2 | length 2733.9
  Top Layer w10: J1.4 1604.33,301.97 1611.14,295.16 1619.02,295.16 1677.95,236.22 1732.28,236.22 1889.76,393.7 3566.04,393.7 3766.73,594.39 3766.73,682.09 3755.16,693.66 3725.16,693.66 3700.79,669.29 3700.79,629.92 3676.42,605.55 3579.6,605.55 3573.74,611.41 3573.74,650.67 U1.2
SDA: J1.5 U1.1 U3.1 | length 2396.2
  Top Layer w10: J1.5 1663.39,317.72 1670.2,324.53 1678.07,324.53 1771.61,418.07 3528.31,418.07 3582.68,472.44 3582.68,551.18 3553.15,580.71 3553.15,590.55 ; U1.1 3553.15,590.55 ; U3.1 3741.14,604.04 3737.58,600.47 3710.71,600.47 3700.79,590.55 3553.15,590.55
THERM: LED14.PAD LED15.PAD LED16.PAD LED17.PAD LED18.PAD LED19.PAD LED20.PAD LED21.PAD LED22.PAD LED23.PAD LED24.PAD LED25.PAD LED26.PAD LED27.PAD LED28.PAD LED29.PAD LED30.PAD LED31.PAD LED32.PAD LED33.PAD LED34.PAD LED35.PAD LED49.PAD LED50.PAD LED51.PAD LED52.PAD LED53.PAD LED54.PAD LED55.PAD LED56.PAD LED57.PAD LED58.PAD LED59.PAD LED60.PAD LED61.PAD LED62.PAD LED63.PAD LED64.PAD LED65.PAD LED66.PAD LED67.PAD LED68.PAD LED69.PAD LED70.PAD LED71.PAD LED72.PAD LED73.PAD LED74.PAD LED75.PAD LED76.PAD LED77.PAD LED78.PAD LED79.PAD LED80.PAD
VCC: C1.1 C2.1 C3.1 J1.3 U1.8 U2.8 U3.8 | length 5188.1
  Top Layer w10: U2.8 2795.28,860.28 2789.42,866.14 2726.38,866.14 2716.54,856.3 C3.1 2705.79,748.03 2677.17,748.03 2480.32,551.18 1417.32,551.18 1377.95,511.81 1377.95,242.08 1383.81,236.22 1496.06,236.22 1541.13,281.28 1541.13,305.69 J1.3 1545.28,317.72 1552.09,324.53 1559.96,324.53 1668.5,433.07 3419.34,433.07 3435.48,449.21 3435.48,728.78 3464.57,757.87 C1.1 ; 3436.1,765.75 3513.78,765.75 ; 3503.94,765.75 U1.8 3554.06,766.65 3554.06,781.78 3623.42,851.14 3769.35,851.14 ; U3.8 3741.14,822.93 3769.35,851.14 ; C2.1 3937.01,805.56 3911.64,830.93 3891.42,851.14 3769.35,851.14
pads on no net: J1.6 J1.S1 J1.S2 JA1.9 JA1.10 JA1.11 JA1.12 JC1.9 JC1.10 JC1.11 JC1.12 U1.3 U2.2 U2.3 U2.5 U2.6 U2.7 U3.3

## Polygon pours and split planes (outlines as drawn)
GND on Top Layer "GND_L01_P036" (solid, remove dead copper, pour order 36): 2598.43,905.51 4055.12,905.51 4055.12,393.7 2598.43,393.7
NetJC1_8 on Top Layer "NETJC1_8_L01_P035" (solid, pour order 35): 6220.47,1102.36 6220.47,856.3 5511.81,856.3 5511.81,1096.95 5506.4,1102.36
THERM on Top Layer "THERM_L01_P032" (solid, pour order 32): 787.4,984.25 787.4,2519.68 2952.76,2519.68 2952.76,2362.2 3031.5,2283.46 3307.09,2283.46 3385.83,2362.2 3385.83,2519.68 5511.81,2519.68 5511.81,944.88 4881.89,944.88 4881.89,2165.35 3543.31,2165.35 3543.31,1968.5 3346.46,1968.5 3346.46,2204.72 2952.76,2204.72 2952.76,1968.5 2716.54,1968.5 2716.54,2165.35 1377.95,2165.35 1377.95,984.25
THERM on Top Layer "THERM_L01_P031" (solid, pour order 31): 1377.95,1535.43 2913.39,1535.43 2913.39,1732.28 3346.46,1732.28 3346.46,1535.43 4881.89,1535.43 4881.89,944.88 1377.95,944.88
NetJC1_5 on Top Layer "NETJC1_5_L01_P034" (solid, pour order 34): 4724.41,2165.35 4881.89,2165.35 4881.89,1535.43 4566.93,1535.43 4724.41,1692.91
NetJA1_1 on Top Layer "NETJA1_1_L01_P033" (solid, pour order 33): 1574.8,1535.43 1377.95,1535.43 1377.95,2165.35 1574.8,2165.35 1377.95,2165.35 1574.8,2165.35
NetJA1_1 on Top Layer "NETJA1_1_L01_P026" (solid, pour order 26): 78.74,1102.36 787.4,1102.36 787.4,984.25 1377.95,984.25 1377.95,826.77 1811.02,826.77 1811.02,629.92 1181.1,629.92 1181.1,393.7 78.74,393.7
NetJA1_1 on Top Layer "NETJA1_1_L01_P025" (solid, pour order 25): 1653.54,1417.32 1771.65,1417.32 1771.65,787.4 1653.54,787.4
NetLED41_C on Top Layer "NETLED41_C_L01_P009" (solid, pour order 9): 2716.54,1535.43 2716.54,1968.5 2952.76,1968.5 2952.76,2204.72 3149.61,2204.72 3149.61,1771.65 3110.24,1732.28 2913.39,1732.28 2913.39,1535.43 2716.54,1535.43 2714.49,1537.48 2714.49,1678.23
NetLED22_C on Top Layer "NETLED22_C_L01_P029" (solid, pour order 29): 5274.53,1705.79 5353.27,1705.79 5354.33,1704.72 5354.33,1129.92 5273.46,1129.92 5273.46,1710.79
NetLED21_C on Top Layer "NETLED21_C_L01_P030" (solid, pour order 30): 5274.75,2295.28 5354.33,2295.28 5354.33,1720.47 5273.46,1720.47 5273.46,2301.34
NetLED43_C on Top Layer "NETLED43_C_L01_P011" (solid, pour order 11): 3543.31,2165.35 3779.53,2165.35 3779.53,1535.43 3557.99,1535.43 3543.31,1550.12
NetLED37_C on Top Layer "NETLED37_C_L01_P005" (solid, pour order 5): 2047.24,2165.35 2047.24,1535.43 1811.02,1535.43 1811.02,2165.35 1811.02,1535.43 1811.02,2165.35
NetLED36_C on Top Layer "NETLED36_C_L01_P004" (solid, pour order 4): 1574.8,2165.35 1811.02,2165.35 1811.02,1535.43 1574.8,1535.43
NetLED15_C on Top Layer "NETLED15_C_L01_P028" (solid, pour order 28): 944.88,2283.46 1023.62,2283.46 1024.68,2282.4 1024.68,1707.6 943.82,1707.6 943.82,2288.46
NetLED8_C on Top Layer "NETLED8_C_L01_P027" (solid, pour order 27): 4724.41,2519.68 5118.11,2519.68 5118.11,2874.02 5669.29,2874.02 5669.29,2519.68 5511.81,2519.68 5511.81,2283.46 6220.47,2283.46 6220.47,3031.5 4724.41,3031.5
NetLED7_C on Top Layer "NETLED7_C_L01_P024" (solid, pour order 24): 3385.83,2362.2 3385.83,2519.68 4724.41,2519.68 4724.41,2952.76 3543.31,2952.76 3149.61,2559.06 3149.61,2283.46 3307.09,2283.46 3149.61,2283.46 3307.09,2283.46
NetLED6_C on Top Layer "NETLED6_C_L01_P022" (solid, pour order 22): 2755.91,2952.76 3149.61,2559.06 3149.61,2283.46 3031.5,2283.46 2952.76,2362.2 2952.76,2519.68 2947.34,2525.1 1574.8,2525.1 1574.8,2952.76 1574.8,2525.1 1574.8,2952.76
NetLED5_C on Top Layer "NETLED5_C_L01_P021" (solid, pour order 21): 78.74,2283.46 787.4,2283.46 787.4,2519.68 590.55,2519.68 590.55,2834.65 1299.21,2834.65 1299.21,2519.68 1574.8,2519.68 1574.8,3031.5 78.74,3031.5 78.74,2283.46 781.99,2283.46 787.4,2288.88
NetLED14_C on Top Layer "NETLED14_C_L01_P020" (solid, pour order 20): 944.88,1692.91 1023.62,1692.91 1024.68,1691.85 1024.68,1117.05 943.82,1117.05 943.82,1697.91
NetLED12_C on Top Layer "NETLED12_C_L01_P019" (solid, pour order 19): 6220.47,1417.32 5511.81,1417.32 5511.81,1102.36 6220.47,1102.36
NetLED11_C on Top Layer "NETLED11_C_L01_P018" (solid, pour order 18): 6220.47,1712.6 5511.81,1712.6 5511.81,1417.32 6220.47,1417.32
NetLED10_C on Top Layer "NETLED10_C_L01_P017" (solid, pour order 17): 6220.47,1968.5 5511.81,1968.5 5511.81,1692.91 6220.47,1692.91
NetLED9_C on Top Layer "NETLED9_C_L01_P016" (solid, pour order 16): 6220.47,2283.46 5511.81,2283.46 5511.81,1968.5 6220.47,1968.5
NetLED47_C on Top Layer "NETLED47_C_L01_P015" (solid, pour order 15): 4448.82,1535.43 4566.93,1535.43 4724.41,1692.91 4724.41,2165.35 4448.82,2165.35
NetLED46_C on Top Layer "NETLED46_C_L01_P014" (solid, pour order 14): 4448.82,1535.43 4448.82,2165.35 4212.6,2165.35 4212.6,1535.43 4212.6,2165.35 4212.6,1535.43
NetLED45_C on Top Layer "NETLED45_C_L01_P013" (solid, pour order 13): 4015.75,2165.35 4212.6,2165.35 4212.6,1535.43 4015.75,1535.43
NetLED44_C on Top Layer "NETLED44_C_L01_P012" (solid, pour order 12): 4015.75,1535.43 4015.75,2165.35 3779.53,2165.35 3779.53,1535.43 3779.53,2165.35 3779.53,1535.43
NetLED42_C on Top Layer "NETLED42_C_L01_P010" (solid, pour order 10): 3149.61,2204.72 3149.61,1771.65 3188.98,1732.28 3346.46,1732.28 3346.46,1535.43 3543.31,1535.43 3543.31,1968.5 3346.46,1968.5 3346.46,2204.72
NetLED40_C on Top Layer "NETLED40_C_L01_P008" (solid, pour order 8): 2480.32,2165.35 2716.54,2165.35 2716.54,1535.43 2480.32,1535.43
NetLED39_C on Top Layer "NETLED39_C_L01_P007" (solid, pour order 7): 2244.09,2165.35 2480.32,2165.35 2480.32,1535.43 2244.09,1535.43
NetLED38_C on Top Layer "NETLED38_C_L01_P006" (solid, pour order 6): 2047.24,2165.35 2047.24,1535.43 2244.09,1535.43 2244.09,2165.35
NetLED4_C on Top Layer "NETLED4_C_L01_P003" (solid, pour order 3): 787.4,2283.46 78.74,2283.46 78.74,1968.5 787.4,1968.5
NetLED3_C on Top Layer "NETLED3_C_L01_P002" (solid, pour order 2): 787.4,1968.5 78.74,1968.5 78.74,1692.91 787.4,1692.91
NetLED2_C on Top Layer "NETLED2_C_L01_P001" (solid, pour order 1): 787.4,1712.6 78.74,1712.6 78.74,1417.32 787.4,1417.32
NetLED1_C on Top Layer "NETLED1_C_L01_P000" (solid, pour order 0): 787.4,1417.32 78.74,1417.32 78.74,1102.36 787.4,1102.36

## Silkscreen, mask and mechanical layers (free items; w line width, h text height)
Top Overlay:
  text "LEDBRICK PLUS Rev0" at 59.06,3308.02 h100
  text "© 2025 StackFoundry LLC" at 59.06,3226.16 h100
  text "ANODE" at 649.61,433.63 h60
  text "6" at 5255.91,413.95 h60
  text "8" at 5374.02,413.95 h60
  text "1" at 4960.63,413.39 h60
  text "2" at 5019.68,413.39 h60
  text "3" at 5078.74,413.87 h60
  text "4" at 5137.8,413.39 h60
  text "5" at 5196.85,413.87 h60
  text "7" at 5314.96,413.39 h60
  text "1W" at 1437.01,393.7 h60 r90
  text "GND" at 1495.5,393.7 h60 r90
  text "VCC" at 1554.67,393.66 h60 r90
  text "SCL" at 1613.61,393.7 h60 r90
  text "SDA" at 1672.67,393.7 h60 r90
Mechanical 1:
  the board outline again, w10

## Text inside footprints (layer, text, board x,y; h text height)
LED1: Top Overlay "C" at 575.25,1181.1 h60 r270
LED2: Top Overlay "C" at 575.25,1499.02 h60 r270
LED3: Top Overlay "C" at 575.25,1791.34 h60 r270
LED4: Top Overlay "C" at 575.25,2044.29 h60 r270
LED5: Top Overlay "C" at 575.25,2365.16 h60 r270
LED6: Top Overlay "C" at 1653.54,2613.72 h60 r180
LED7: Top Overlay "C" at 3228.35,2338.13 h60 r180
LED8: Top Overlay "C" at 4803.15,2613.72 h60 r180
LED9: Top Overlay "C" at 5723.96,2204.72 h60 r90
LED10: Top Overlay "C" at 5723.96,1889.76 h60 r90
LED11: Top Overlay "C" at 5723.96,1633.86 h60 r90
LED12: Top Overlay "C" at 5723.96,1338.58 h60 r90
LED13: Top Overlay "C" at 5723.96,1023.62 h60 r90
LED14: Top Overlay "C" at 1000.45,1173.23 h60 r270
LED15: Top Overlay "C" at 1000.45,1783.46 h60 r270
LED16: Top Overlay "C" at 1000.45,2354.33 h60 r270
LED17: Top Overlay "C" at 2039.37,2267.27 h60 r180
LED18: Top Overlay "C" at 2354.33,2267.27 h60 r180
LED19: Top Overlay "C" at 4007.87,2267.27 h60 r180
LED20: Top Overlay "C" at 4283.46,2267.27 h60 r180
LED21: Top Overlay "C" at 5298.76,2212.6 h60 r90
LED22: Top Overlay "C" at 5298.76,1641.73 h60 r90
LED23: Top Overlay "C" at 5298.76,1041.34 h60 r90
LED24: Top Overlay "C" at 1503.94,1118.56 h60
LED25: Top Overlay "C" at 1257.87,1118.56 h60
LED26: Top Overlay "C" at 1498.03,2267.27 h60 r180
LED27: Top Overlay "C" at 1734.25,2267.27 h60 r180
LED28: Top Overlay "C" at 2748.03,2267.27 h60 r180
LED29: Top Overlay "C" at 2905.51,2031.05 h60 r180
LED30: Top Overlay "C" at 3496.06,2031.05 h60 r180
LED31: Top Overlay "C" at 3653.54,2267.27 h60 r180
LED32: Top Overlay "C" at 4559.06,2267.27 h60 r180
LED33: Top Overlay "C" at 4795.28,2267.27 h60 r180
LED34: Top Overlay "C" at 4889.76,1118.56 h60
LED35: Top Overlay "C" at 4663.39,1118.56 h60
LED36: Top Overlay "C" at 1653.54,1944.43 h60 r180
LED37: Top Overlay "C" at 1889.76,1590.1 h60 r180
LED38: Top Overlay "C" at 2125.98,1944.43 h60 r180
LED39: Top Overlay "C" at 2325.79,1590.1 h60 r180
LED40: Top Overlay "C" at 2559.06,1944.43 h60 r180
LED41: Top Overlay "C" at 2795.28,1590.1 h60 r180
LED42: Top Overlay "C" at 3228.35,1944.43 h60 r180
LED43: Top Overlay "C" at 3622.05,1590.1 h60 r180
LED44: Top Overlay "C" at 3858.27,1944.43 h60 r180
LED45: Top Overlay "C" at 4097.44,1590.1 h60 r180
LED46: Top Overlay "C" at 4291.34,1944.43 h60 r180
LED47: Top Overlay "C" at 4527.56,1590.1 h60 r180
LED48: Top Overlay "C" at 4803.15,1944.43 h60 r180
LED49: Top Overlay "C" at 1197.3,1488.19 h60 r270
LED50: Top Overlay "C" at 1197.3,1783.46 h60 r270
LED51: Top Overlay "C" at 1197.3,2078.74 h60 r270
LED54: Top Overlay "C" at 5134.31,1488.19 h60 r270
LED55: Top Overlay "C" at 5134.31,1773.62 h60 r270
LED56: Top Overlay "C" at 5134.31,2049.21 h60 r270
LED57: Top Overlay "C" at 1921.26,1204.27 h60 r180
LED58: Top Overlay "C" at 2314.96,1204.27 h60 r180
LED59: Top Overlay "C" at 2748.03,1204.27 h60 r180
LED60: Top Overlay "C" at 3062.99,1401.12 h60 r180
LED61: Top Overlay "C" at 3338.58,1401.12 h60 r180
LED62: Top Overlay "C" at 3653.54,1204.27 h60 r180
LED63: Top Overlay "C" at 4086.61,1204.27 h60 r180
LED64: Top Overlay "C" at 4480.31,1204.27 h60 r180
LED65: Top Overlay "C" at 1921.26,1401.12 h60 r180
LED66: Top Overlay "C" at 2314.96,1401.12 h60 r180
LED67: Top Overlay "C" at 2748.03,1401.12 h60 r180
LED68: Top Overlay "C" at 3062.99,1597.98 h60 r180
LED69: Top Overlay "C" at 3338.58,1597.98 h60 r180
LED70: Top Overlay "C" at 3653.54,1401.12 h60 r180
LED71: Top Overlay "C" at 4086.61,1401.12 h60 r180
LED72: Top Overlay "C" at 4480.31,1401.12 h60 r180
LED73: Top Overlay "C" at 1921.26,1007.42 h60 r180
LED74: Top Overlay "C" at 2314.96,1007.42 h60 r180
LED75: Top Overlay "C" at 2748.03,1007.42 h60 r180
LED76: Top Overlay "C" at 3062.99,1204.27 h60 r180
LED77: Top Overlay "C" at 3338.58,1204.27 h60 r180
LED78: Top Overlay "C" at 3653.54,1007.42 h60 r180
LED79: Top Overlay "C" at 4086.61,1007.42 h60 r180
LED80: Top Overlay "C" at 4480.31,1007.42 h60 r180